# Altium PCB SM3320-BATT-EV.PcbDoc (part 1 of 2)
Units mm, origin at the board's own origin, x right, y up, seen from the top; angles counter-clockwise.
Board outline 215 x 68 mm, 2 copper layers (Top Layer, Bottom Layer), stack 1.662 mm thick; 183 components, 86 nets, 440 pads, 263 vias.
Unrouted connection lines stored in the file: 6.
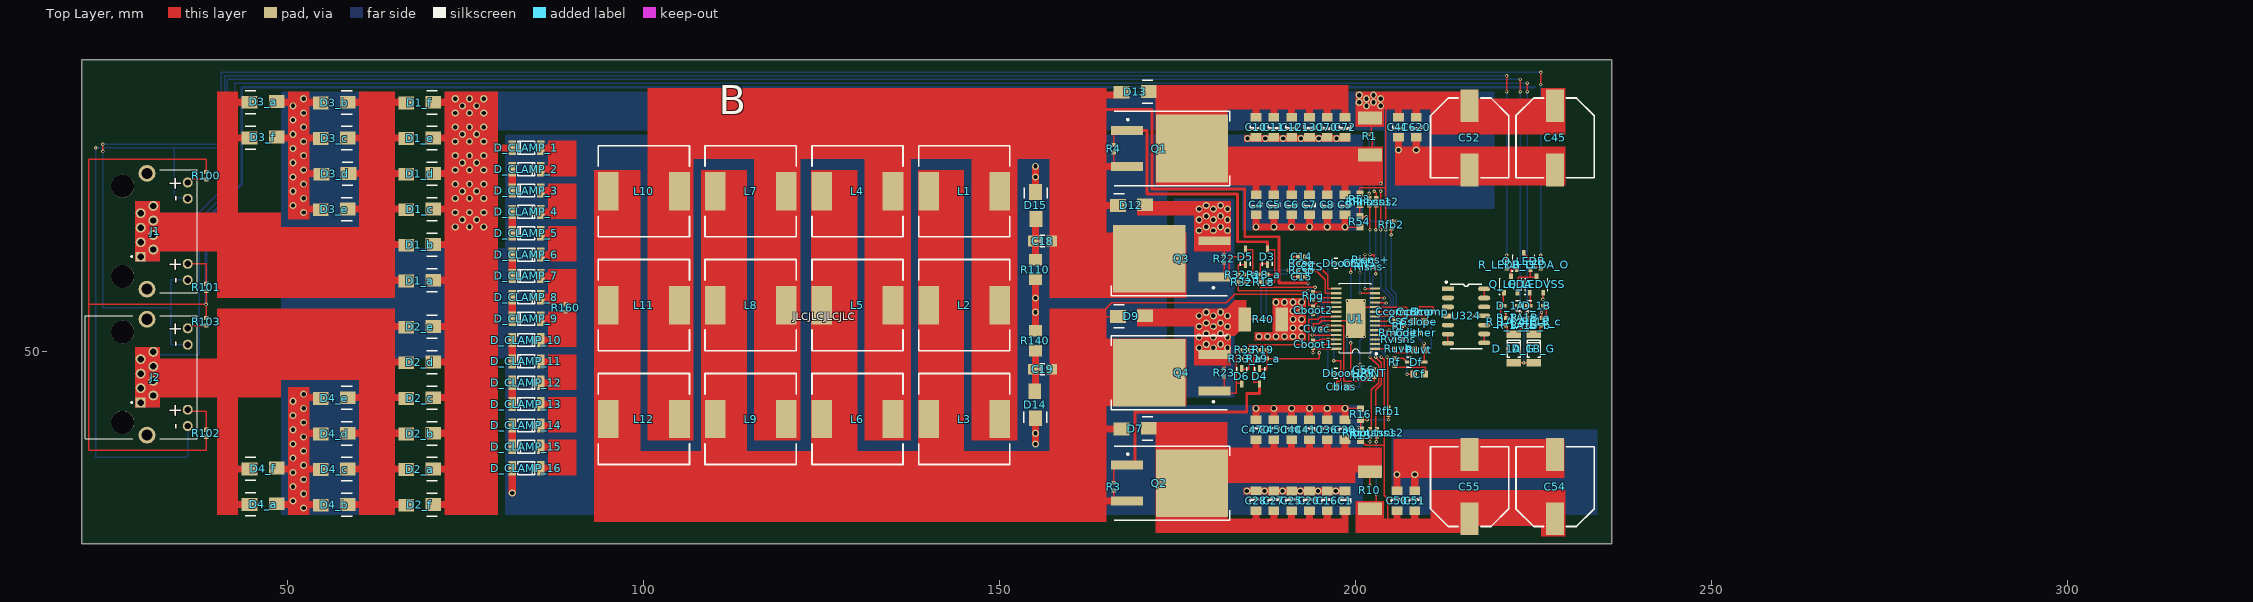
[diagram p0: Top Layer view]
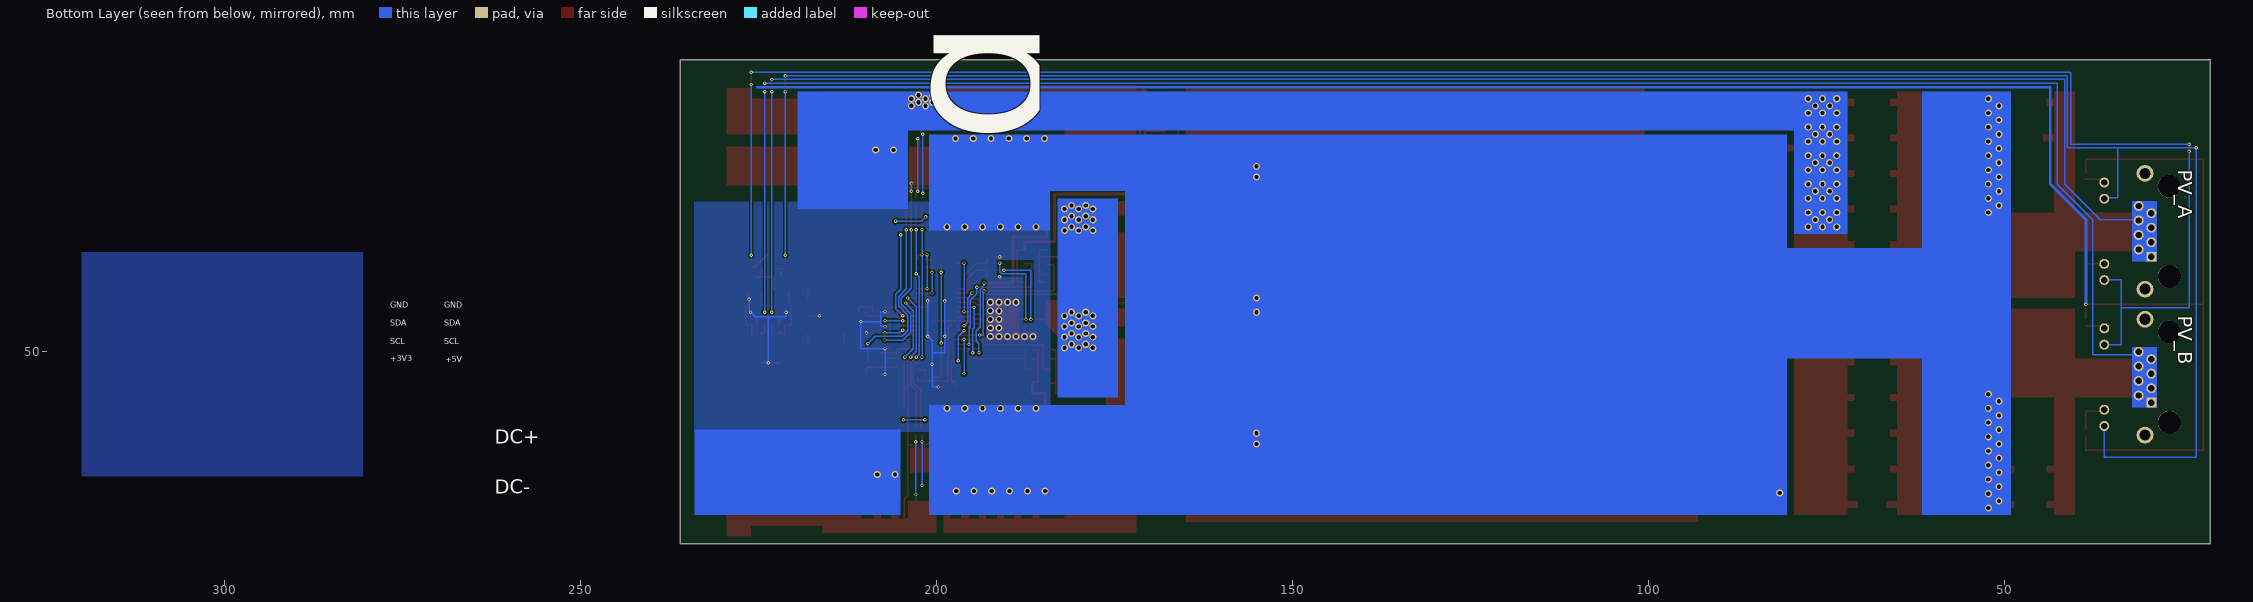
[diagram p1: Bottom Layer view, seen from below]
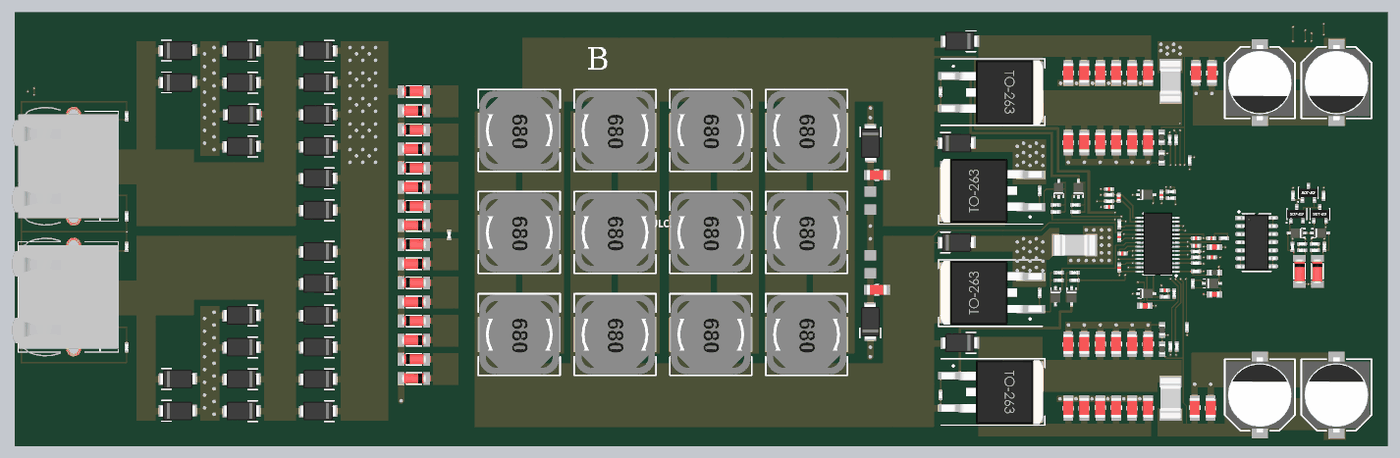
[diagram p3: 3D render of the assembled board from above, using the file's embedded part models]

## Layer stack, top to bottom
Top Solder: solder mask 0.0102, Solder Resist, Dk 3.5
Top Layer: signal copper 0.0711
Dielectric1: core 1.52, FR-4, Dk 4.8
Bottom Layer: signal copper 0.0711
Bottom Solder: solder mask 0.0102, Solder Resist, Dk 3.5

## Board outline
21,23 21,91 236,91.001 236,23

## Design rules (kind name [scope] priority, off if disabled: settings)
Clearance Clearance_12 [(IsRegion AND InNet('VIN_D') AND OnLayer('MidLayer4'))] p1: gap=0.61 ignorepadtopadclearanceinfootprint=FALSE except(0: Arc-Hole Track-Hole SMDPad-Hole THPad-Hole Via-Hole Fill-Hole Poly-Hole Region-Hole Text-Hole)
Clearance Clearance_11 [(IsRegion AND InNet('GND') AND OnLayer('MidLayer3'))] p2 off: gap=0.61 ignorepadtopadclearanceinfootprint=FALSE except(0: Arc-Hole Track-Hole SMDPad-Hole THPad-Hole Via-Hole Fill-Hole Poly-Hole Region-Hole Text-Hole)
Clearance Clearance_10 [InNamedPolygon('Top Layer-No Net 15')] p3: gap=0.635 ignorepadtopadclearanceinfootprint=FALSE except(0: Arc-Hole Track-Hole SMDPad-Hole THPad-Hole Via-Hole Fill-Hole Poly-Hole Region-Hole Text-Hole)
Clearance Clearance_8 [InNamedPolygon('Bottom Layer-No Net 5')] p4: gap=0.635 ignorepadtopadclearanceinfootprint=FALSE except(0: Arc-Hole Track-Hole SMDPad-Hole THPad-Hole Via-Hole Fill-Hole Poly-Hole Region-Hole Text-Hole)
Clearance Clearance_6 [InNamedPolygon('MidLayer1-No Net 5')] p5: gap=0.406 ignorepadtopadclearanceinfootprint=FALSE except(0: Arc-Hole Track-Hole SMDPad-Hole THPad-Hole Via-Hole Fill-Hole Poly-Hole Region-Hole Text-Hole)
Clearance Clearance_13 [InNamedPolygon('MidLayer3-No Net 5')] p6: gap=0.406 ignorepadtopadclearanceinfootprint=FALSE except(0: Arc-Hole Track-Hole SMDPad-Hole THPad-Hole Via-Hole Fill-Hole Poly-Hole Region-Hole Text-Hole)
Clearance Clearance_5 [InNamedPolygon('Top Layer-No Net 16')] p7: gap=0.635 ignorepadtopadclearanceinfootprint=FALSE except(0: Arc-Hole Track-Hole SMDPad-Hole THPad-Hole Via-Hole Fill-Hole Poly-Hole Region-Hole Text-Hole)
Clearance Clearance_3 [InNamedPolygon('Top Layer-No Net 17')] p8: gap=0.635 ignorepadtopadclearanceinfootprint=FALSE except(0: Arc-Hole Track-Hole SMDPad-Hole THPad-Hole Via-Hole Fill-Hole Poly-Hole Region-Hole Text-Hole)
Clearance Clearance_1 [InNamedPolygon('Bottom Layer-No Net 5')] p9: gap=0.635 ignorepadtopadclearanceinfootprint=FALSE except(0: Arc-Hole Track-Hole SMDPad-Hole THPad-Hole Via-Hole Fill-Hole Poly-Hole Region-Hole Text-Hole)
Clearance [InNamedPolygon('MidLayer1-No Net 5')] p10: gap=1.016 ignorepadtopadclearanceinfootprint=FALSE except(0: Arc-Hole Track-Hole SMDPad-Hole THPad-Hole Via-Hole Fill-Hole Poly-Hole Region-Hole Text-Hole)
Clearance HV_NETS [InNetClass('HV_NETS')] p11: gap=0.61 ignorepadtopadclearanceinfootprint=FALSE except(0: Arc-Hole Track-Hole SMDPad-Hole THPad-Hole Via-Hole Fill-Hole Poly-Hole Region-Hole Text-Hole)
Clearance Clearance_2 [All] p12: gap=0.254 ignorepadtopadclearanceinfootprint=FALSE except(0: Arc-Hole Track-Hole SMDPad-Hole THPad-Hole Via-Hole Fill-Hole Poly-Hole Region-Hole Text-Hole)
Clearance Clearance_9 [(InComponent('P1')) vs (OnLayer('Keep-Out Layer'))] p13: gap=0 ignorepadtopadclearanceinfootprint=FALSE
Clearance Clearance_7 [InNamedPolygon('Top Layer-No Net 4')] p14: gap=0.241 ignorepadtopadclearanceinfootprint=FALSE except(0: Arc-Hole Track-Hole SMDPad-Hole THPad-Hole Via-Hole Fill-Hole Poly-Hole Region-Hole Text-Hole)
Clearance Clearance_4 [InNamedPolygon('MidLayer1-No Net')] p15: gap=0.241 ignorepadtopadclearanceinfootprint=FALSE except(0: Arc-Hole Track-Hole SMDPad-Hole THPad-Hole Via-Hole Fill-Hole Poly-Hole Region-Hole Text-Hole)
ComponentClearance [All] p1: gap=0.635 collisioncheckmode=3 verticalgap=0.254 showdistances=FALSE
ComponentClearance ComponentClearance_1 [All] p2: gap=0.254 collisioncheckmode=3 verticalgap=0.254 showdistances=FALSE
DiffPairsRouting DiffPairsRouting_1 [All] p2: maxlimit=0.254 minlimit=0.254 mostfreqgap=0.254 toplayer_minwidth=0.381 toplayer_maxwidth=0.381 toplayer_prefwidth=0.381 bottomlayer_minwidth=0.381 bottomlayer_maxwidth=0.381 bottomlayer_prefwidth=0.381 maxuncoupledlength=12.7
FabricationTestPointUsage TestPointUsage [All] p1: valid=0 allowmultiple=FALSE
FabricationTestPointUsage TestPointUsage_1 [All] p2: valid=0 allowmultiple=FALSE
FabricationTestpoint Testpoint [All] p1: side=3 testpointundercomponent=TRUE minsize=1.016 maxsize=2.54 preferedsize=1.524 minholesize=0 maxholesize=1.016 preferedholesize=0.813 testpointgrid=0.025 allowsidetop=TRUE allowsidebottom=TRUE usegrid=TRUE gridtolerance=0
FabricationTestpoint Testpoint_1 [All] p2: side=3 testpointundercomponent=TRUE minsize=1.016 maxsize=2.54 preferedsize=1.524 minholesize=0 maxholesize=1.016 preferedholesize=0.813 testpointgrid=0.025 allowsidetop=TRUE allowsidebottom=TRUE usegrid=TRUE gridtolerance=0
FanoutControl Fanout_LCC [IsLCC] p1: bgadir=Out bgaviamode=Centered fanoutstyle=Auto fanoutdirection=Alternating viagrid=0.025 // Fanout_LCC (Default Rule)
FanoutControl Fanout_BGA [IsBGA] p2: bgadir=Out bgaviamode=Centered fanoutstyle=Auto fanoutdirection=Alternating viagrid=0.025 // Fanout_BGA (Default Rule)
FanoutControl Fanout_Default [All] p4: bgadir=Out bgaviamode=Centered fanoutstyle=Auto fanoutdirection=Alternating viagrid=0.025 // Fanout_Default (Default Rule)
FanoutControl Fanout_Small [(CompPinCount < 5)] p5: bgadir=Out bgaviamode=Centered fanoutstyle=Auto fanoutdirection=OutThenIn viagrid=0.025 // Fanout_Small (Default Rule)
FanoutControl Fanout_BGA_1 [IsBGA] p6: bgadir=Out bgaviamode=Centered fanoutstyle=Auto fanoutdirection=Alternating viagrid=0.025 // Fanout_BGA (Default Rule)
FanoutControl Fanout_LCC_1 [IsLCC] p7: bgadir=Out bgaviamode=Centered fanoutstyle=Auto fanoutdirection=Alternating viagrid=0.025 // Fanout_LCC (Default Rule)
FanoutControl Fanout_SOIC_1 [IsSOIC] p8: bgadir=Out bgaviamode=Centered fanoutstyle=Auto fanoutdirection=Alternating viagrid=0.025 // Fanout_SOIC (Default Rule)
FanoutControl Fanout_Small_1 [(CompPinCount < 5)] p9: bgadir=Out bgaviamode=Centered fanoutstyle=Auto fanoutdirection=OutThenIn viagrid=0.025 // Fanout_Small (Default Rule)
FanoutControl Fanout_Default_1 [All] p10: bgadir=Out bgaviamode=Centered fanoutstyle=Auto fanoutdirection=Alternating viagrid=0.025 // Fanout_Default (Default Rule)
Height Height_1 [All] p2: minheight=0 maxheight=25.4 prefheight=12.7
HoleSize [All] p1: absolutevalues=TRUE maxlimit=6.375 minlimit=0.198 maxpercent=80.000 minpercent=20.000
HoleSize HoleSize_1 [All] p2: absolutevalues=TRUE maxlimit=2.54 minlimit=0.025 maxpercent=80.000 minpercent=20.000
LayerPairs LayerPairs_1 [All] p2: enforce=TRUE
MinimumAnnularRing [All] p1: minimumring=0.203
PasteMaskExpansion PasteMaskExpansion_1 [All] p2: expansion=0
PlaneClearance PlaneClearance_1 [All] p2: clearance=0.508
PlaneConnect [All] p1: planeconnectstyle=Relief reliefexpansion=0.254 reliefentries=4 reliefconductorwidth=0.203 reliefairgap=0.254
PolygonConnect PolygonConnect_12 [All vs IsNamedPolygon('Top Layer-No Net 4') Or  IsNamedPolygon('Top Layer-GND') Or  IsNamedPolygon('Vout') Or  IsNamedPolygon('Top Layer-No Net 4') Or  IsNamedPolygon('Top Layer-No Net 4') Or  IsNamedPolygon('Top Layer-No Net 4') Or  IsNamedPolygon('Top Layer-No Net 4') Or  IsNamedPolygon('Top Layer-No Net 4') Or  IsNamedPolygon('Top Layer-No Net 4') Or  IsNamedPolygon('Top Layer-No Net 4') Or  IsNamedPolygon('Top Layer-No Net 4') Or  IsNamedPolygon('Top Layer-No Net 4') Or  IsNamedPolygon('Top Layer-No Net 4') Or  IsNamedPolygon('Top Layer-No Net 4') Or  IsNamedPolygon('MidLayer1-No Net') Or  IsNamedPolygon('Top Layer-No Net 4') Or  IsNamedPolygon('Top Layer-No Net 4') Or  IsNamedPolygon('Top Layer-No Net 4') Or  IsNamedPolygon('Top Layer-No Net 4') Or  IsNamedPolygon('Top Layer-No Net 4') Or  IsNamedPolygon('Top Layer-No Net 3') Or  IsNamedPolygon('Top Layer-No Net 4') Or  IsNamedPolygon('Top Layer-No Net 4') Or  IsNamedPolygon('Top Layer-No Net 4') Or  IsNamedPolygon('Top Layer-No Net 4') Or  IsNamedPolygon('Top Layer-No Net 3') Or  IsNamedPolygon('Top Layer-No Net 4') Or  IsNamedPolygon('Top Layer-No Net 4') Or  IsNamedPolygon('Top Layer-No Net 1') Or  IsNamedPolygon('Top Layer-No Net 4') Or  IsNamedPolygon('Top Layer-No Net 4') Or  IsNamedPolygon('Top Layer-No Net 4') Or  IsNamedPolygon('Top Layer-No Net 2') Or  IsNamedPolygon('Top Layer-No Net 4') Or  IsNamedPolygon('Top Layer-No Net 4') Or  IsNamedPolygon('Top Layer-No Net 4') Or  IsNamedPolygon('Top Layer-No Net 4') Or  IsNamedPolygon('Top Layer-No Net') Or  IsNamedPolygon('Top Layer-No Net 4')] p1: connectstyle=Direct reliefconductorwidth=0.254 reliefentries=4 polygonreliefangle="90 Angle" airgapwidth=0.254
PolygonConnect PolygonConnect_11 [All vs IsNamedPolygon('Vout') Or  IsNamedPolygon('MidLayer1-No Net')] p2: connectstyle=Direct reliefconductorwidth=0.254 reliefentries=4 polygonreliefangle="90 Angle" airgapwidth=0.254
PolygonConnect PolygonConnect_10 [All vs IsNamedPolygon('Top Layer-No Net 4')] p3: connectstyle=Direct reliefconductorwidth=0.254 reliefentries=4 polygonreliefangle="90 Angle" airgapwidth=0.254
PolygonConnect PolygonConnect_9 [All vs IsNamedPolygon('Top Layer-No Net 4')] p4: connectstyle=Direct reliefconductorwidth=0.254 reliefentries=4 polygonreliefangle="90 Angle" airgapwidth=0.254
PolygonConnect PolygonConnect_8 [All vs IsNamedPolygon('Top Layer-No Net') Or  IsNamedPolygon('MidLayer1-No Net') Or  IsNamedPolygon('Top Layer-No Net 4')] p5: connectstyle=Direct reliefconductorwidth=0.254 reliefentries=4 polygonreliefangle="90 Angle" airgapwidth=0.254
PolygonConnect PolygonConnect_7 [All vs IsNamedPolygon('Top Layer-No Net') Or  IsNamedPolygon('Top Layer-No Net 3') Or  IsNamedPolygon('MidLayer1-No Net')] p6: connectstyle=Direct reliefconductorwidth=0.254 reliefentries=4 polygonreliefangle="90 Angle" airgapwidth=0.254
PolygonConnect PolygonConnect_6 [All vs IsNamedPolygon('Top Layer-No Net 2') Or  IsNamedPolygon('MidLayer1-No Net') Or  IsNamedPolygon('Top Layer-No Net')] p7: connectstyle=Direct reliefconductorwidth=0.254 reliefentries=4 polygonreliefangle="90 Angle" airgapwidth=0.254
PolygonConnect PolygonConnect_5 [All vs IsNamedPolygon('Top Layer-No Net') Or  IsNamedPolygon('Top Layer-No Net 1') Or  IsNamedPolygon('MidLayer1-No Net')] p8: connectstyle=Direct reliefconductorwidth=0.254 reliefentries=4 polygonreliefangle="90 Angle" airgapwidth=0.254
PolygonConnect PolygonConnect_4 [All vs IsNamedPolygon('MidLayer1-No Net') Or  IsNamedPolygon('Top Layer-No Net')] p9: connectstyle=Direct reliefconductorwidth=0.254 reliefentries=4 polygonreliefangle="90 Angle" airgapwidth=0.254
PolygonConnect PolygonConnect_3 [All vs IsNamedPolygon('Top Layer-No Net') Or  IsNamedPolygon('Top Layer-GND')] p10: connectstyle=Direct reliefconductorwidth=0.254 reliefentries=4 polygonreliefangle="90 Angle" airgapwidth=0.254
PolygonConnect PolygonConnect_2 [All vs IsNamedPolygon('Top Layer-No Net')] p11: connectstyle=Direct reliefconductorwidth=0.254 reliefentries=4 polygonreliefangle="90 Angle" airgapwidth=0.254
PolygonConnect [All] p12: connectstyle=Direct reliefconductorwidth=0.203 reliefentries=4 polygonreliefangle="90 Angle" airgapwidth=0.254
PolygonConnect PolygonConnect_1 [All] p13: connectstyle=Direct reliefconductorwidth=0.254 reliefentries=4 polygonreliefangle="90 Angle" airgapwidth=0.254
RoutingPriority RoutingPriority_1 [All] p2: routingpriority=0
RoutingTopology RoutingTopology_1 [All] p2: topology=Shortest
RoutingVias [All] p1: holewidth=0.406 width=0.813 viastyle="Through Hole" minholewidth=0.254 minwidth=0.635 maxholewidth=0.508 maxwidth=1.016
ShortCircuit ShortCircuit_1 [All] p2: allowed=FALSE
SilkToSolderMaskClearance SilkscreenOverComponentPads [IsPad] p1: minsilkscreentomaskgap=0.127 clearancetoexposedcopper=TRUE
SolderMaskExpansion SolderMaskExpansion_2 [(IsVia And (HoleDiameter  < 15))] p1: expansion=-0.356
SolderMaskExpansion [All] p2: expansion=0.051
SolderMaskExpansion SolderMaskExpansion_1 [All] p3: expansion=0.051
UnRoutedNet UnRoutedNet_1 [All] p2:
Width [All] p1: maxlimit=2.54 minlimit=0.152 preferedwidth=0.254
20 further rules are at their usual default settings.

## Components (designator, comment, footprint, x,y, rotation, side; value= is the part's Value field where it differs from the comment)
C1 "1206B105K101NT" C_1206#1 198.497,28.995 r270 top value=1uF
C4 "1206B105K101NT" C_1206#1 186.003,70.605 r90 top value=1uF
C5 "1206B105K101NT" C_1206#1 188.5,70.6 r90 top value=1uF
C6 "1206B105K101NT" C_1206#1 191,70.6 r90 top value=1uF
C7 "1206B105K101NT" C_1206#1 193.5,70.6 r90 top value=1uF
C8 "1206B105K101NT" C_1206#1 196,70.6 r90 top value=1uF
C9 "1206B105K101NT" C_1206#1 198.5,70.6 r90 top value=1uF
C10 "1206B105K101NT" C_1206#1 186,81.5 r90 top value=1uF
C11 "1206B105K101NT" C_1206#1 188.5,81.5 r90 top value=1uF
C12 "1206B105K101NT" C_1206#1 191,81.5 r90 top value=1uF
C14 "0402CG6R8C500NT" C_0402 192.4,63.3 r180 top value=6.8pF
C15 "0402CG6R8C500NT" C_0402 192.4,60.5 r180 top value=6.8pF
C16 "1206B105K101NT" C_1206#1 195.997,28.995 r270 top value=1uF
C18 "1206B102K202NT" C_1206#2 156,65.5 r0 top value=1nF
C19 "1206B102K202NT" C_1206#2 156,47.5 r0 top value=1nF
C20 "1206B105K101NT" C_1206#1 193.497,28.995 r270 top value=1uF
C25 "1206B105K101NT" C_1206#1 190.997,28.995 r270 top value=1uF
C27 "1206B105K101NT" C_1206#1 188.497,28.995 r270 top value=1uF
C28 "1206B105K101NT" C_1206#1 186,29 r270 top value=1uF
C30 "1206B105K101NT" C_1206#1 198.5,39 r270 top value=1uF
C36 "1206B105K101NT" C_1206#1 195.997,38.995 r270 top value=1uF
C41 "1206B105K101NT" C_1206#1 206,81.5 r90 top value=1uF
C44 "1206B105K101NT" C_1206#1 190.997,38.995 r270 top value=1uF
C45 "VZH470M2ATR-1010" C_CAN_1010 228,80 r90 top value=47uF
C50 "1206B105K101NT" C_1206#1 205.8,29 r270 top value=1uF
C51 "1206B105K101NT" C_1206#1 208.3,29 r270 top value=1uF
C52 "VZH470M2ATR-1010" C_CAN_1010 216,80 r90 top value=47uF
C54 "VZH470M2ATR-1010" C_CAN_1010 228,31 r270 top value=47uF
C55 "VZH470M2ATR-1010" C_CAN_1010 216,31 r270 top value=47uF
C56 "CL05A105KA5NQNC" C_0402 201.1,47.4 r0 top value=1uF
C70 "1206B105K101NT" C_1206#1 196,81.5 r90 top value=1uF
C72 "1206B105K101NT" C_1206#1 198.5,81.5 r90 top value=1uF
C130 "1206B105K101NT" C_1206#1 193.5,81.5 r90 top value=1uF
C410 "1206B105K101NT" C_1206#1 193.497,38.995 r270 top value=1uF
C450 "1206B105K101NT" C_1206#1 188.497,38.995 r270 top value=1uF
C470 "1206B105K101NT" C_1206#1 185.997,38.995 r270 top value=1uF
C620 "1206B105K101NT" C_1206#1 208.5,81.5 r90 top value=1uF
Cbias "CC0603KRX7R9BB104" C_0603 198,45 r180 top value=100nF
Cboot1 "CL05B224KO5NNNC" C_0402 194,51 r90 top value=220nF
Cboot2 "CL05B224KO5NNNC" C_0402 194,55.8 r270 top value=220nF
Ccomp "CL05B103KB5NNNC" C_0402 208.4,55.6 r0 top value=10nF
Ccomp2 "0402B151K500NT" C_0402 206,55.6 r180 top value=150pF
CCS "0402CG560J500NT" C_0402 193.9,61.9 r270 top value=56pF
Cdither "0402B223K500NT" C_0402 208.5,52.6 r180 top value=22nF
Cf "CC0603KRX7R9BB104" C_0603 208.9,46.8 r0 top value=100nF
CISNS "CL05A105KA5NQNC" C_0402 200.6,62.4 r90 top value=1uF
Cslope "CL10C331JB8NNNC" C_0603 208.9,54.2 r180 top value=330pF
Css "CL05B104KO5NNNC" C_0402 206,54.4 r180 top value=100nF
Cvcc "CL05A105KA5NQNC" C_0402 194.5,53.2 r0 top value=1uF
D1_a "SS210" DO-214AC 68.5,60 r180 top
D1_b "SS210" DO-214AC 68.5,65 r180 top
D1_c "SS210" DO-214AC 68.5,70 r180 top
D1_d "SS210" DO-214AC 68.5,75 r180 top
D1_e "SS210" DO-214AC 68.5,80 r180 top
D1_f "SS210" DO-214AC 68.5,85 r180 top
D2_a "SS210" DO-214AC 68.5,33.5 r180 top
D2_b "SS210" DO-214AC 68.5,38.5 r180 top
D2_c "SS210" DO-214AC 68.5,43.5 r180 top
D2_d "SS210" DO-214AC 68.5,48.5 r180 top
D2_e "SS210" DO-214AC 68.5,53.5 r180 top
D2_f "SS210" DO-214AC 68.5,28.5 r180 top
D3 "N4148WS" SOD-323 187.6,63.3 r90 top
D3_a "SS210" DO-214AC 46.5,85 r0 top
D3_b "SS210" DO-214AC 56.5,85 r180 top
D3_c "SS210" DO-214AC 56.5,80 r180 top
D3_d "SS210" DO-214AC 56.6,75 r180 top
D3_e "SS210" DO-214AC 56.5,70 r180 top
D3_f "SS210" DO-214AC 46.5,80 r0 top
D4 "N4148WS" SOD-323 186.5,46.5 r270 top
D4_a "SS210" DO-214AC 46.5,28.5 r0 top
D4_b "SS210" DO-214AC 56.5,28.5 r180 top
D4_c "SS210" DO-214AC 56.5,33.5 r180 top
D4_d "SS210" DO-214AC 56.5,38.5 r180 top
D4_e "SS210" DO-214AC 56.5,43.5 r180 top
D4_f "SS210" DO-214AC 46.5,33.5 r0 top
D5 "N4148WS" SOD-323 184.5,63.3 r90 top
D6 "N4148WS" SOD-323 184,46.5 r270 top
D7 "SS210" DO-214AC 169,39.2 r180 top
D9 "SS210" DO-214AC 168.5,54.9 r0 top
D12 "SS210" DO-214AC 168.5,70.5 r0 top
D13 "SS210" DO-214AC 169,86.5 r180 top
D14 "SS210" DO-214AC 155,42.5 r90 top
D15 "SS210" DO-214AC 155,70.5 r270 top
D_1A "N4148WS" SOD-323 221.8,56.4 r180 top
D_1A_G "ZMM5V6-M" DO-213AA 222.2,50.4 r270 top
D_1B "N4148WS" SOD-323 225.4,56.4 r0 top
D_1B_G "ZMM5V6-M" DO-213AA 225,50.4 r270 top
D_CLAMP_1 "ZMM5V6-M" DO-213AA 83.5,78.6 r0 top
D_CLAMP_2 "ZMM5V6-M" DO-213AA 83.5,75.6 r180 top
D_CLAMP_3 "ZMM5V6-M" DO-213AA 83.5,72.6 r0 top
D_CLAMP_4 "ZMM5V6-M" DO-213AA 83.5,69.6 r180 top
D_CLAMP_5 "ZMM5V6-M" DO-213AA 83.5,66.6 r0 top
D_CLAMP_6 "ZMM5V6-M" DO-213AA 83.5,63.6 r180 top
D_CLAMP_7 "ZMM5V6-M" DO-213AA 83.5,60.6 r0 top
D_CLAMP_8 "ZMM5V6-M" DO-213AA 83.5,57.6 r180 top
D_CLAMP_9 "ZMM5V6-M" DO-213AA 83.5,54.6 r0 top
D_CLAMP_10 "ZMM5V6-M" DO-213AA 83.5,51.6 r180 top
D_CLAMP_11 "ZMM5V6-M" DO-213AA 83.5,48.6 r0 top
D_CLAMP_12 "ZMM5V6-M" DO-213AA 83.5,45.6 r180 top
D_CLAMP_13 "ZMM5V6-M" DO-213AA 83.5,42.6 r0 top
D_CLAMP_14 "ZMM5V6-M" DO-213AA 83.5,39.6 r180 top
D_CLAMP_15 "ZMM5V6-M" DO-213AA 83.5,36.6 r0 top
D_CLAMP_16 "ZMM5V6-M" DO-213AA 83.5,33.6 r180 top
Dboot1 "N4148WS" SOD-323 198.2,46.9 r0 top
Dboot2 "N4148WS" SOD-323 198.2,62.4 r0 top
Df "N4148WS" SOD-323 208.5,48.5 r0 top
J1 "2-406549-1" TE_2-406549-1 29.305,63.297 r270 top
J2 "2-406549-1" TE_2-406549-1 29.305,42.797 r270 top
L1 "SWRB1207S-221MT" SRR1260 145,72.5 r180 top value=220uH
L2 "SWRB1207S-221MT" SRR1260 145,56.5 r180 top value=220uH
L3 "SWRB1207S-221MT" SRR1260 145,40.5 r180 top value=220uH
L4 "SWRB1207S-221MT" SRR1260 130,72.5 r180 top value=220uH
L5 "SWRB1207S-221MT" SRR1260 130,56.5 r180 top value=220uH
L6 "SWRB1207S-221MT" SRR1260 130,40.5 r180 top value=220uH
L7 "SWRB1207S-221MT" SRR1260 115,72.5 r180 top value=220uH
L8 "SWRB1207S-221MT" SRR1260 115,56.5 r180 top value=220uH
L9 "SWRB1207S-221MT" SRR1260 115,40.5 r180 top value=220uH
L10 "SWRB1207S-221MT" SRR1260 100,72.5 r180 top value=220uH
L11 "SWRB1207S-221MT" SRR1260 100,56.5 r180 top value=220uH
L12 "SWRB1207S-221MT" SRR1260 100,40.5 r180 top value=220uH
Q1 "IRF9540NSTRLPBF" TO-263-3 174.079,78.5 r0 top
Q2 "IRF9540NSTRLPBF" TO-263-3 174.079,31.5 r0 top
Q3 "IRF9540NSTRLPBF" TO-263-3 173.921,63 r180 top
Q4 "IRF9540NSTRLPBF" TO-263-3 173.921,47 r180 top
Q_LEDA "2N7002" TO-236AB 221.8,59.4 r90 top
Q_LEDB "2N7002" TO-236AB 223.6,62.7 r90 top
Q_LEDVSS "2N7002" TO-236AB 225.4,59.4 r90 top
R1 "1m" R_2512 202,80.2 r90 top
R3 "0402WGF1002TCE" R_0402 166,31 r270 top value=10k
R4 "0402WGF1002TCE" R_0402 166,78.5 r90 top value=10k
R10 "1m" R_2512 202,30.5 r270 top
R13 "0603WAF100KT5E" R_0603 200.7,38.2 r270 top value=100k
R16 "0603WAF1002T5E" R_0603 200.7,41.2 r270 top value=10k
R18 "0402WGF100JTCE" R_0402 187.1,59.7 r0 top value=10R
R18_a "0402WGF100JTCE" R_0402 187.1,60.8 r0 top value=10R
R19 "0402WGF100JTCE" R_0402 187,50.2 r0 top value=10R
R19_a "0402WGF100JTCE" R_0402 187,49 r0 top value=10R
R22 "0402WGF1002TCE" R_0402 181.5,63 r270 top value=10k
R23 "0402WGF1002TCE" R_0402 181.5,47 r90 top value=10k
R32 "0402WGF100JTCE" R_0402 184,59.7 r0 top value=10R
R32_a "0402WGF100JTCE" R_0402 184,60.8 r0 top value=10R
R33 "0402WGF100JTCE" R_0402 184.492,50.2 r0 top value=10R
R33_a "0402WGF100JTCE" R_0402 184.492,49 r0 top value=10R
R40 "1m" R_2512 187,54.5 r0 top
R53 "0603WAF100KT5E" R_0603 200.6,71.4 r90 top value=100k
R54 "0603WAF1002T5E" R_0603 200.6,68.2 r90 top value=10k
R62 "0402WGF0000TCE" R_0402 201.1,46.4 r0 top value=0R
R100 "0402WGF1000TCE" R_0402 38.5,74.7 r270 top value=100R
R101 "0402WGF1000TCE" R_0402 38.5,59 r90 top value=100R
R102 "0402WGF1000TCE" R_0402 38.5,38.5 r90 top value=100R
R103 "0402WGF1000TCE" R_0402 38.5,54.2 r270 top value=100R
R110 "1206W4F100JT5E" R_1206 155,61.5 r90 top value=10R
R140 "1206W4F100JT5E" R_1206 155,51.5 r270 top value=10R
R160 "0402WGF0000TCE" R_0402 89,56.1 r90 top value=0R
R_1A_a "0402WGF4702TCE" R_0402 222.608,54.7 r180 top value=47k
R_1A_b "0402WGF4702TCE" R_0402 222.6,53.7 r0 top value=47k
R_1A_c "0402WGF1003TCE" R_0402 221.1,54.2 r270 top value=100k
R_1B_a "0402WGF4702TCE" R_0402 224.6,54.7 r0 top value=47k
R_1B_b "0402WGF4702TCE" R_0402 224.6,53.7 r180 top value=47k
R_1B_c "0402WGF1003TCE" R_0402 226.1,54.2 r270 top value=100k
R_LEDA_O "0402WGF0000TCE" R_0402 226,62.2 r90 top value=0R
R_LEDB_O "0402WGF0000TCE" R_0402 221.2,62.2 r90 top value=0R
Rcomp "0402WGF1202TCE" R_0402 210.4,55.6 r180 top value=12k
Rcsg "0402WGF1000TCE" R_0402 192.4,62.4 r180 top value=100R
Rcsp "0402WGF1000TCE" R_0402 192.4,61.4 r180 top value=100R
Rf "0402WGF100JTCE" R_0402 205.5,48.5 r90 top value=10R
Rfb1 "0402WGF0000TCE" R_0402 204.6,41.6 r270 top value=0R
Rfb2 "0402WGF0000TCE" R_0402 205,67.8 r90 top value=0R
Riinsns1 "0402WGF0000TCE" R_0402 201.9,71 r90 top value=0R
Riinsns2 "0402WGF0000TCE" R_0402 202.9,71 r90 top value=0R
RINT "0402WGF0000TCE" R_0402 202.6,46.9 r90 top value=0R
Rioutsns1 "0402WGF0000TCE" R_0402 202,38.6 r270 top value=0R
Rioutsns2 "0402WGF0000TCE" R_0402 203,38.6 r270 top value=0R
Risns+ "0402WGF1000TCE" R_0402 202.1,62.9 r0 top value=100R
Risns- "0402WGF1000TCE" R_0402 202.1,61.9 r0 top value=100R
Rmode "0402WGF1003TCE" R_0402 206,52.6 r180 top value=100k
Rpg "0402WGF1002TCE" R_0402 194,57.8 r90 top value=10k
Rt "0402WGF2202TCE" R_0402 206,53.5 r180 top value=22k
Ruvb "0402WGF2202TCE" R_0402 206,50.4 r180 top value=22k
Ruvt "0603WAF100KT5E" R_0603 208.9,50.2 r0 top value=100k
Rvisns "0402WGF2201TCE" R_0402 206,51.7 r180 top value=2.2k
U1 "LM5176PWPR" TSSOP-28-EP-P0.65MM-W4.4MM 200,54.6 r180 top
U324 "LM324" SOIC-14-P1.27-W3.5 215.5,55 r0 top

## Footprints (in the part's own frame and the unit in brackets; to place one, negate y for a bottom-side part, rotate by r counter-clockwise, add the part's x,y. Pads: shape width x height; smd on the part's side, far side on the other; paste and mask are expansions set on the pad)
C_0402 [mm] "Chip Capacitor; Body 1.0 x 0.5 mm (LxW typ)"
  rect 0.6x0.6 smd: 1(-0.508,0) 2(0.508,0)
  body extent -0.5,-0.3 0.5,0.3, height 0.2
C_0603 [mm] "Chip Capacitor; Body 1.6 x 0.8 mm (LxW typ)"
  rect 0.93x0.98 smd: 1(-0.77,0) 2(0.77,0)
  body extent -0.8,-0.4 0.8,0.4, height 0.3
C_1206#1 [mm] "Chip Capacitor; Body 3.2 x 1.6 mm (LxW typ)"
  rect 1.2x1.5 smd: 1(-1.395,0) 2(1.395,0)
  silkscreen extent -0.3,-0.8 0.3,0.8, body extent -1.6,-0.8 1.6,0.8, height 1
C_1206#2 [mm] "Chip Capacitor; Body 3.2 x 1.6 mm (LxW typ)"
  rect 1.5x1.5 smd: 1(-1.295,0) 2(1.295,0)
  silkscreen extent -0.3,-0.8 0.3,0.8, body extent -1.6,-0.8 1.6,0.8, height 1
C_CAN_1010 [mm] "SMD-ECAP-10x10"
  rect 4.6x2.5 smd: 1(-4.5,0) 2(4.5,0)
  silkscreen extent -5.6,-5.5 5.6,5.5, body extent -5.9,-5.25 5.9,5.25, height 10.3
DO-213AA [mm] "2 Leads"
  rect 1.1x2 smd: 1(-2,0) 2(2,0)
  silkscreen extent -1.2,-0.9 1.2,0.9, body extent -1.85,-0.8 1.85,0.8, height 1.61
DO-214AC [mm] "SMA Diode"
  rect 2.2x1.8 smd: 1(-1.9,0) 2(1.9,0.1)
  silkscreen extent -2.5,-1.6 -1,1.65, body extent -2.8,-1.48 2.8,1.47, height 2.9
R_0402 [mm] "Body 1.0 x 0.5 mm (LxW typ)"
  rect 0.6x0.6 smd: 1(-0.508,0) 2(0.508,0)
  body extent -0.5,-0.25 0.5,0.25, height 0.35
R_0603 [mm] "Body 1.6 x 0.8 mm (LxW typ)"
  rect 0.93x0.98 smd: 1(-0.77,0) 2(0.77,0)
  body extent -0.82,-0.41 0.83,0.41, height 0.46
R_1206 [mm] "Body 3.2 x 1.6 mm (LxW typ)"
  rect 1.6x1.8 smd: 1(-1.4,0) 2(1.4,0)
  body extent -1.91,-0.76 1.91,0.76, height 1
R_2512 [mm] "VISHAY SHUNT RESISTOR"
  rect 1.8x3.4 smd: 1(-2.6,0) 2(2.6,0)
  body extent -3.17,-1.57 3.17,1.6, height 1.22
SOD-323 [mm] "SOD-323/SC-76; 2 Leads; Body 1.7 x 1.3 mm, (LxW)"
  rect 1x0.45 smd: 1(-1.1,0) 2(1.1,0)
  silkscreen extent -1.3,-0.7 -0.7,0.7, body extent -1.43,-0.74 1.43,0.76, height 1.12
SOIC-14-P1.27-W3.5 [mm]
  rect 1.7x0.65 smd: 1(-2.54,3.78)
  oval 1.7x0.65 smd: 2(-2.54,2.51) 3(-2.54,1.24) 4(-2.54,-0.03) 5(-2.54,-1.3) 6(-2.54,-2.57) 7(-2.54,-3.84) 8(2.55,-3.8) 9(2.55,-2.55) 10(2.55,-1.3) 11(2.55,0) 12(2.55,1.25) 13(2.55,2.5) 14(2.55,3.8)
  silkscreen extent -2.9,-4.6 2.25,4.86, body extent -3,-4.45 3,4.35, height 1.7
SRR1260 [mm] "High Current Inductors"
  rect 2.9x5.4 smd: 1(-5,0) 2(5,0)
  silkscreen extent -6.4,-6.4 6.4,6.4, body extent -6.25,-6.25 6.25,6.25, height 6.29
TE_2-406549-1 [mm]
  rect 1.398x1.398 hole 0.89: 1(0,0)
  round 1.398 hole 0.89: 2(-1.02,1.78) 3(-2.04,0) 4(-3.06,1.78) 5(-4.08,0) 6(-5.1,1.78) 7(-6.12,0) 8(-7.14,1.78) 9(3.28,6.61) 10(0.99,6.61) 11(-8.15,6.61) 12(-10.44,6.61)
  round 2.355 hole 1.57: S1(-11.71,0.89) S2(4.55,0.89)
  round 3.25 hole 3.25 unplated: ""(-9.93,-2.54) ""(2.77,-2.54)
  silkscreen extent -12.21,-1.37 5.05,7.93, body extent -12.9,-8.76 5.74,7.96, height 14.6
TO-236AB [mm] "SOT-23-3 Leads; Body 3.1 x 3 mm, inc. leads (LxW max)"
  rect 0.8x0.55 smd: 1(-1.15,0.95) 2(-1.15,-0.95) 3(1.15,0)
  silkscreen extent -1.45,-1.55 0.9,1.65, body extent -1.28,-1.5 1.27,1.5, height 1
TO-263-3 [mm] "D2PAK"
  rect 4.5x1.25 smd: 1(-6.223,2.54) 3(-6.223,-2.54)
  rect 10.16x9.5 smd: 2(2.921,0)
  silkscreen extent -8.02,-5.21 8.25,5.21, body extent -7.94,-5.05 7.94,4.95, height 4.3
TSSOP-28-EP-P0.65MM-W4.4MM [mm] "Shrink Small Outline; 28 Leads"
  rect 2.8x5.5 smd: 0(0,0)
  rect 1.45x0.3 smd: 1(-2.7,4.23) 2(-2.7,3.58) 3(-2.7,2.93) 4(-2.7,2.28) 5(-2.7,1.63) 6(-2.7,0.98) 7(-2.7,0.33) 8(-2.7,-0.32) 9(-2.7,-0.97) 10(-2.7,-1.62) 11(-2.7,-2.27) 12(-2.7,-2.92) 13(-2.7,-3.57) 14(-2.7,-4.22) 15(2.75,-4.225) 16(2.75,-3.575) 17(2.75,-2.925) 18(2.75,-2.275) 19(2.75,-1.625) 20(2.75,-0.975) 21(2.75,-0.325) 22(2.75,0.325) 23(2.75,0.975) 24(2.75,1.625) 25(2.75,2.275) 26(2.75,2.925) 27(2.75,3.575) 28(2.75,4.225)
  silkscreen extent -3.03,-5 2.3,5.02, body extent -3.25,-5.02 3.25,4.78, height 1.1

## Part data
C1 C4 C5 C6 C7 C8 C9 C10 C11 C12 C16 C20 C25 C27 C28 C30 C36 C41 C44 C50 C51 C70 C72 C130 C410 C450 C470 C620: "C - CAPACITOR - MLCC - 1uF - 100V - 1206 - X7R", JLC Availability=Extended, LCSC Part #=C91151, WVDC=100
C14 C15: "C - CAPACITOR - MLCC - 6.8pF - 50V - 0402", JLC Availability=Basic, LCSC Part #=C1576, WVDC=50
C18 C19: "C - CAPACITOR - MLCC - 1nF - 2000V - 1206 - X7R", JLC Availability=Basic, LCSC Part #=C9196, WVDC=2000
C45 C52 C54 C55: "C - CAPACITOR - ELECTROLYTIC - 47uF - 100V", JLC Availability=Extended, LCSC Part #=C164068, ESR=40mOhm, WVDC=100
C56 CISNS Cvcc: "C - CAPACITOR - MLCC - 1uF - 25V - 0402", JLC Availability=Basic, LCSC Part #=C52923, WVDC=16
Cbias Cf: "C - CAPACITOR - MLCC - 100nF - 50V - 0603", JLC Availability=Basic, LCSC Part #=C14663, WVDC=50
Cboot1 Cboot2: "C - CAPACITOR - MLCC - 220nF - 16V - 0402", JLC Availability=Basic, LCSC Part #=C16772, WVDC=16
Ccomp: "C - CAPACITOR - MLCC - 10nF - 50V - 0402", JLC Availability=Basic, LCSC Part #=C15195, WVDC=50
Ccomp2: "C - CAPACITOR - MLCC - 150pF - 50V - 0402", JLC Availability=Basic, LCSC Part #=C1527, WVDC=50
CCS: "C - CAPACITOR - MLCC - 56pF - 50V -  0402", JLC Availability=Basic, LCSC Part #=C1572, WVDC=50
Cdither: "C - CAPACITOR - MLCC - 22nF - 50V - 0402", JLC Availability=Basic, LCSC Part #=C1532, WVDC=50
Cslope: "C - CAPACITOR - MLCC - 330pF - 50V - 0603", JLC Availability=Basic, LCSC Part #=C1664, WVDC=50
Css: "C - CAPACITOR - MLCC - 100nF - 16V - 0402", JLC Availability=Basic, LCSC Part #=C1525, WVDC=16
D1_a D1_b D1_c D1_d D1_e D1_f D2_a D2_b D2_c D2_d D2_e D2_f D3_a D3_b D3_c D3_d D3_e D3_f D4_a D4_b D4_c D4_d D4_e D4_f D7 D9 D12 D13 D14 D15: "D - DIODE - SCHOTTKY - 100V - 2A", JLC Availability=Extended, LCSC Part #=C14996, If=2A, Vrrm=100
D3 D4 D5 D6 D_1A D_1B Dboot1 Dboot2 Df: "D - DIODE - FAST TRR - 100V - 150mA - 4ns", JLC Availability=Basic, LCSC Part #=C2128, If=150mA, PIV=100V, Trr=4ns
D_1A_G D_1B_G D_CLAMP_1 D_CLAMP_2 D_CLAMP_3 D_CLAMP_4 D_CLAMP_5 D_CLAMP_6 D_CLAMP_7 D_CLAMP_8 D_CLAMP_9 D_CLAMP_10 D_CLAMP_11 D_CLAMP_12 D_CLAMP_13 D_CLAMP_14 D_CLAMP_15 D_CLAMP_16: "D - DIODE - ZENER - 5.6V - 500mW", JLC Availability=BASIC, LCSC Part #=C8062
J1 J2: "J - JACK - ETHERNET - Right - THT", JLC Availability=Extended, LCSC Part #=C125068
L1 L2 L3 L4 L5 L6 L7 L8 L9 L10 L11 L12: "L - INDUCTOR - 220uH - 1.6A - 12.5mm", JLC Availability=Extended, LCSC Part #=C169380, Isat=1.6A
Q1 Q2 Q3 Q4: "Q - TRANSISTOR - MOSFET (N) - 250V - 33A - 0.094R", JLC Availability=Extended, LCSC Part #=C33903, WVDC=100
Q_LEDA Q_LEDB Q_LEDVSS: "Q - TRANSISTOR - MOSFET (N) - 60V - 200mW", JLC Availability=Basic, LCSC Part #=C8545, WVDC=60
R1 R10 R40: library part EWSL2512F1L00S9, "R - RESISTOR - SMD - 0.001R - 1% - 2512 - 2W - 50ppm/k", JLC Availability=Extended, LCSC Part #=C349153, Power=2W, ComponentLink1Description=http://riedon.com/media/pdf/CSR.pdf, ComponentLink1URL=http://riedon.com/media/pdf/CSR.pdf
R3 R4 R22 R23 Rpg: "R - RESISTOR - SMD - 10k - 1% - 0402", JLC Availability=Basic, LCSC Part #=C25744
R13 R53 Ruvt: "R - RESISTOR - SMD - 100k - 1% -  0603", JLC Availability=Basic, LCSC Part #=C22936
R16 R54: "R - RESISTOR - SMD - 10k - 1% - 0603", JLC Availability=Basic, LCSC Part #=C25804
R18 R18_a R19 R19_a R32 R32_a R33 R33_a Rf: "R - RESISTOR - SMD - 10R - 1% - 0402", JLC Availability=Basic, LCSC Part #=C25077
R62 R160 R_LEDA_O R_LEDB_O Rfb1 Rfb2 Riinsns1 Riinsns2 RINT Rioutsns1 Rioutsns2: "R - RESISTOR - SMD - 0R - 1% - 0402", JLC Availability=Basic, LCSC Part #=C17168
R100 R101 R102 R103 Rcsg Rcsp Risns+ Risns-: "R - RESISTOR - SMD - 100R - 1% - 0402", JLC Availability=Basic, LCSC Part #=C25076
R110 R140: "R - RESISTOR - SMD - 10R - 1% - 1206", JLC Availability=Basic, LCSC Part #=C17903
R_1A_a R_1A_b R_1B_a R_1B_b: "R - RESISTOR - SMD - 47k - 1% - 0402", JLC Availability=Basic, LCSC Part #=C25792
R_1A_c R_1B_c Rmode: "R - RESISTOR - SMD - 100k - 1% -  0402", JLC Availability=Basic, LCSC Part #=C25741
Rcomp: "R - RESISTOR - SMD - 12k - 1% - 0402", JLC Availability=Basic, LCSC Part #=C25752
Rt Ruvb: "R - RESISTOR - SMD - 22k - 1% - 0402", JLC Availability=Basic, LCSC Part #=C25768
Rvisns: "R - RESISTOR - SMD - 2.2k - 1% - 0402", JLC Availability=Basic, LCSC Part #=C25879
U1: "U - IC - 55-V wide VIN synchronous 4-switch buck-boost controller 28-HTSSOP -40 to 125", LCSC Part #=C442493, Package=None, Availability=Extended, MP=LM5176QPWPR, Price=None
U324: library part LM324DT, "U - IC - OP AMP (QUAD)", JLC Availability=Basic, LCSC Part #=C71035, Speed=0.4V/us

## Via types
v1: diameter 1, hole 0.6, Top Layer to Bottom Layer, tented both sides, 168 vias
v2: diameter 0.48, hole 0.254, Top Layer to Bottom Layer, tented both sides, 95 vias

## Nets (pads, with @x,y where several pads share a name; then routed paths per layer and width w, separated by ;. In a path a pad name is that pad's centre, name@x,y a point inside that pad or via, vN(x,y) a via of type N, cw(c..) or ccw(c..) an arc to the next point about the centre after c; other vN are vias at no path point)
1A_GATE: D_1A.2 D_1A_G.1 Q_LEDA.1 R_1A_b.2 R_1A_c.2 | length 9
  Top Layer w0.2: D_1A.2@220.3,56.4 220.4,56.3 220.4,53.692 R_1A_c.2@221,53.692 ; D_1A.2@220.7,56.6 Q_LEDA.1@220.7,58.25 ; D_1A_G.1@221.3,52.1 R_1A_c.2@221.3,53.8 ; D_1A_G.1@221.6,52.4 221.8,52.6 D_1A_G.1@222.1,52.6 ; D_1A_G.1@223.1,52.2 R_1A_b.2@223.1,53.9
1B_GATE: D_1B.2 D_1B_G.1 R_1B_b.2 R_1B_c.2 | length 6.9
  Top Layer w0.2: R_1B_b.2@224.1,53.9 224.1,52.8 D_1B_G.1@224.5,52.4 ; D_1B_G.1@224.6,52.5 D_1B_G.1@224.7,52.6 ; D_1B_G.1@225.9,52.2 R_1B_c.2@225.9,53.9 ; R_1B_c.2@226.1,53.692 226.8,53.692 D_1B.2@226.8,56.4
+3V3: R100.1 R101.1 R102.1 R103.1 U324.4 | length 312.3
  Top Layer w0.2: R102.1@38.5,38 38.5,36.1 22,36.1 22,56.6 ; R103.1@38.5,54.608 v2(38.5,56.6) ; R101.1@38.5,58.5 v2(38.5,56.6) ; R100.1@38.5,75.1 38.5,77 22,77 22,56.6 ; 22,56.6 v2(38.5,56.6)
  Bottom Layer w0.4: v2(38.5,56.6) 38.5,68.5 43.5,73.5 43.5,87.1 225.1,87.1
BG1: D5.1 R32.1 R32_a.1 U1.25 | length 24.3
  Top Layer w0.2: D5.1@184.5,62.2 183.6,62.2 ; v2(193.3,58.5) 183.5,58.5 183.5,62.1 ; v2@194.1,52.3 U1.25@196.8,52.3 ; U1.25@197.25,52.325 U1.25@197.45,52.325 ; 183.5,62.1 183.6,62.2 ; 183.5,62.1 183.5,62.2 183.6,62.2
  Bottom Layer w0.2: v2(193.3,58.5) 193.4,58.4 193.4,52.3 v2(193.9,52.3)
BG2: D6.1 R33.2 R33_a.2 U1.21 | length 20.4
  Top Layer w0.2: D6.1@184,47.5 185,47.5 R33_a.2@185,49 R33.2@185,50.2 185,50.9 193.4,50.9 193.4,54.5 194.7,54.5 195.1,54.9 196.025,54.9 196.2,54.9 197.225,54.9 U1.21@197.25,54.925
BIAS: Cbias.2 U1.24 | length 10.8
  Top Layer w0.2: v2(196.1,52.9) 196.175,52.975 U1.24@197.25,52.975 ; v2(196.9,48.7) 197.9,48.7 197.9,45.8 197.3,45.8 Cbias.2@197.3,45.2
  Bottom Layer w0.2: v2(196.1,52.9) 196.9,52.1 v2(196.9,48.7)
BOOST1: Cboot1.2 Dboot1.1 U1.26 | length 9.2
  Top Layer w0.2: Cboot1.2@194,51.5 194.9,51.5 195.1,51.7 v2(196.1,51.7) 197.25,51.7 U1.26@197.25,51.675 ; v2@196,46.9 v2(196.1,46.9) Dboot1.1@196.9,46.9
  Bottom Layer w0.2: v2@196,51.7 v2(196.1,51.7) v2(196.1,46.9)
BOOST2: Cboot2.2 Dboot2.1 U1.20 | length 11.5
  Top Layer w0.2: Cboot2.2@193.9,55.2 194.5,55.2 194.9,55.6 v2(196.1,55.6) 196.025,55.6 196,55.575 U1.20@197.25,55.575 ; v2@196.2,62.4 Dboot2.1@197.1,62.4 Dboot2.1@197.2,62.4
  Bottom Layer w0.2: v2(196.1,55.6) v2(196.1,62.4)
CSN: C14.1 CCS.1 Rcsg.1 U1.15 | length 7.2
  Top Layer w0.2: Rcsg.1@192.908,62.3 Rcsg.1@192.908,62.4 ; U1.15@196.7,58.8 196.1,58.8 196.1,60.7 194.4,62.4 Rcsg.1@192.908,62.4 ; Rcsg.1@192.908,62.4 C14.1@192.908,63.092 ; C14.1@192.908,63.092 192.9,63.1 C14.1@192.908,63.092
CSP: C15.1 CCS.2 Rcsp.1 U1.16 | length 7.7
  Top Layer w0.2: C15.1@192.9,60.5 C15.1@192.908,60.5 Rcsp.1@192.908,61.4 194.4,61.4 195.7,60.1 195.7,58.175 U1.16@197.25,58.175
DITHER: Cdither.2 U1.5 | length 5.2
  Top Layer w0.2: U1.5@203,53 v2(204.7,53) ; v2(207.2,52.6) Cdither.2@207.992,52.6 Cdither.2@208,52.6
  Bottom Layer w0.2: v2(204.7,53) 205.1,52.6 v2(207.2,52.6)
EN: Ruvb.2 Ruvt.1 U1.1 | length 5.8
  Top Layer w0.2: U1.1@202.7,50.37 204.67,50.37 205.47,50.37 Ruvb.2@205.492,50.392 ; Ruvb.2@205.492,50.4 Ruvb.2@205.492,50.392 ; Ruvt.1@207.9,49.8 205.5,49.8 205.492,49.808 Ruvb.2@205.492,50.392 ; Ruvb.2@205.492,50.392 Ruvb.2@205.496,50.396 ; Ruvb.2@205.496,50.396 205.5,50.4 Ruvb.2@205.496,50.396
FB: Rfb1.1 U1.11 | length 17.4
  Top Layer w0.2: U1.11@202.7,56.87 204.33,56.87 204.3,56.84 v2(204.3,56.8) ; v2(204.4,49.2) 204.5,49.1 Rfb1.1@204.5,42.1
  Bottom Layer w0.2: v2(204.3,56.8) 203.2,55.7 203.2,50.4 v2(204.4,49.2)
FBIN: R53.1 R54.2 Rfb2.2 U324.12 | length 8.2
  Top Layer w0.2: R53.1@200.6,70.63 R54.2@200.6,68.97 R54.2@200.6,68.9 ; R54.2@200.7,68.8 200.6,68.8 R54.2@200.6,68.9 ; v2(201.5,68.9) R54.2@200.6,68.9 ; Rfb2.2@205,68.2 205.1,68.3 v2(205.7,68.3)
  Bottom Layer w0.2: v2(201.5,68.9) 202.1,68.3 v2(205.7,68.3) v2@205.8,68.2
FBIN_B: U324.13 U324.14 | length 1.3
  Top Layer w0.2: U324.14@218,58.7 218.05,58.7 U324.13@218.05,57.5
FBOUT: R13.1 R16.2 Rfb1.2 U324.10 | length 5.9
  Top Layer w0.2: R13.1@200.7,38.9 R13.1@200.7,38.97 R16.2@200.7,40.392 ; R16.2@200.7,40.43 200.7,40.4 v2(201.6,40.4) ; v2(204.6,40.4) Rfb1.2@204.6,40.9
  Bottom Layer w0.2: v2(201.6,40.4) v2(204.6,40.4)
FBOUT_B: U324.8 U324.9 | length 1.3
  Top Layer w0.2: U324.9@218,52.4 218.05,52.4 U324.8@218.05,51.2
GATEVCC: C56.2 R62.2 RINT.2 | length 2.2
  Top Layer w0.2: R62.2@201.5,46.4 R62.2@201.608,46.508 ; R62.2@201.608,46.4 R62.2@201.608,46.508 ; RINT.2@202.6,47.5 RINT.2@202.6,47.408 201.608,47.408 C56.2@201.608,47.4 R62.2@201.608,46.508
GATEVCC_R: Dboot1.2 Dboot2.2 R62.1 | length 17.3
  Top Layer w0.2: v2(199.3,51.2) Dboot1.2@199.3,46.9 199.3,46.4 R62.1@200.592,46.4 ; v2(199.3,61.1) Dboot2.2@199.3,62.4
  Bottom Layer w0.2: v2(199.3,51.2) v2(199.3,61.1)
GND: C1.1 C4.1 C5.1 C6.1 C7.1 C8.1 C9.1 C10.1 C11.1 C12.1 C14.2 C15.2 C16.1 C20.1 C25.1 C27.1 C28.1 C30.1 C36.1 C41.1 C44.1 C45.1 C50.1 C51.1 C52.1 C54.1 C55.1 C56.1 C70.1 C72.1 C130.1 C410.1 C450.1 C470.1 C620.1 Cbias.1 Ccomp2.1 Ccomp.1 Cdither.1 Cf.1 Cslope.1 Css.1 Cvcc.1 D3_a.2 D3_b.2 D3_c.2 D3_d.2 D3_e.2 D3_f.2 D4_a.2 D4_b.2 D4_c.2 D4_d.2 D4_e.2 D4_f.2 D14.1 D15.1 D_1A_G.2 D_1B_G.2 D_CLAMP_16.2 Q_LEDVSS.2 R16.1 R40.2 R54.1 R110.1 R140.1 R_1A_c.1 R_1B_c.1 Rcsg.2 Rmode.1 Rt.1 Ruvb.1 U1.0 U1.10 U1.22 U324.11 | length 107.3
  Top Layer w0.2: v2(187.4,54.5) 189.4,54.5 R40.2@189.4,54.4 ; v2(191.1,60.5) C15.2@191.892,60.5 ; v2(191.1,62.4) Rcsg.2@191.9,62.4 ; v2(191.1,63.3) C14.2@191.892,63.3 ; Cvcc.1@194,53.4 194,53.9 194.8,53.9 195.2,54.3 U1.22@196.9,54.3 ; U1.22@197.25,54.275 200.4,54.275 U1.0@200.4,53.9 ; C30.1@198.6,40.8 C30.1@198.7,40.7 ; v1@198.6,67.4 198.6,67.43 R54.1@200.6,67.43 ; v1@198.9,42 R16.1@200.392,42 ; Cbias.1@198.9,45.008 v2@199.692,45.008 ; C9.1@198.9,68.8 C9.1@199,68.9 ; C56.1@200.592,47.4 200.592,48.192 v2(200.6,48.2) ; U1.0@201.2,56.3 201.2,56.22 U1.10@202.7,56.22 ; U1.10@203.1,56.22 207.2,56.22 v2@207.2,55.7 ; Rt.1@206.5,53.4 206.508,53.392 Rmode.1@206.508,52.6 ; Css.1@206.5,54.4 206.508,54.392 Rt.1@206.508,53.5 v2(207.2,53.5) ; Ruvb.1@206.508,50.4 v2(207.2,50.4) ; Ccomp2.1@206.508,55.6 v2(207.2,55.6) Ccomp.1@207.7,55.6 ; v2(207.2,46.8) Cf.1@207.892,46.8 ; Cdither.1@209.008,52.6 v2(209.8,52.6) ; Cslope.1@209.67,54.2 v2(210.6,54.2) ; v2@216.5,55 U324.11@218.05,55 ; R_1A_c.1@221.1,54.716 v2(221.1,55.5) ; D_1A_G.2@222,48.4 D_1A_G.2@222.2,48.4 v2(223.6,48.4) D_1B_G.2@224.5,48.4 ; R_1B_c.1@226.1,54.716 v2(226.1,55.5) ; v2(226.3,57.3) 226.3,58 Q_LEDVSS.2@226.5,58.2
  Top Layer w1: v1(81.5,30.1) D_CLAMP_16.2@81.5,33.1
  Bottom Layer w0.2: v2(187.4,54.5) 187.4,60.9 190.8,60.9 191.1,61.2 v2@191.1,62.3 ; v1@196,67.4 v1(196,67.5) v1(198.5,67.5) ; 197,41.3 197.3,41.3 ; v2@198.8,57 v2(198.8,52.1) 198.8,49.8 200.6,49.8 ; v2(199.7,45) 200.6,45 v2(200.6,48.2) 200.6,49.8 ; v2@201.2,52 v2(201.2,52.1) ; v2(201.2,57.1) v2(201.2,52.1) ; v2@207.1,55.6 207.8,55.6 207.8,54.2 ; v2(207.2,46.8) v2(207.2,50.4) 210.6,50.4 v2@210.6,54.3 ; v2(207.2,53.5) 207.8,53.5 207.8,54.2 ; v2(210.6,54.2) 207.8,54.2 ; v2(221.1,55.5) 221.1,54.9 223.6,54.9 ; v2(223.6,48.4) 223.6,54.9 ; v2(226.3,57.3) 226.3,55.8 225.4,54.9 223.6,54.9 ; 200.6,49.8 200.6,51.5 v2(201.2,52.1)
  other v1: 52.2,28 50.7,29 52.2,30 184.7,30.4 187.2,30.4 189.7,30.4 192.2,30.4 194.7,30.4 197.2,30.4 50.7,31 52.2,32 205.8,32.7 208.3,32.7 50.7,33 52.2,34 50.7,35 52.2,36 50.7,37 155,37 52.2,38 155,38.5 50.7,39 52.2,40 50.7,41 52.2,42 186,42 188.5,42 191,42 193.5,42 196,42 198.5,42 50.7,43 52.2,44 186.4,52.1 187.6,52.1 188.8,52.1 190,52.1 191.2,52.1 192.4,52.1 191.2,53.3 192.4,53.3 191.2,54.5 192.4,54.5 155,55.5 191.2,55.7 192.4,55.7 188.8,56.9 190,56.9 191.2,56.9 192.4,56.9 155,57.5 186,67.5 188.5,67.5 191,67.5 193.5,67.5 52.2,69.5 50.7,70.5 52.2,71.5 50.7,72.5 52.2,73.5 50.7,74.5 155,74.5 52.2,75.5 155,76 50.7,76.5 52.2,77.5 206,78.3 208.5,78.3 50.7,78.5 52.2,79.5 184.8,79.9 187.3,79.9 189.8,79.9 192.3,79.9 194.8,79.9 197.3,79.9 50.7,80.5 52.2,81.5 50.7,82.5 52.2,83.5 50.7,84.5 52.2,85.5
  other v2: 216.4,55 198.8,57.1
IMON_IN: U324.5
IMON_IN_B: U324.6 U324.7 | length 1.2
  Top Layer w0.2: U324.6@212.96,52.43 212.96,51.24 U324.7@213,51.2
IMON_OUT: U324.3
IMON_OUT_B: U324.1 U324.2
INTVCC: Cvcc.2 RINT.1 Rpg.2 U1.23 | length 22.6
  Top Layer w0.2: Rpg.2@194,58.308 v2@194.908,58.308 ; Cvcc.2@195,53.2 195.4,53.6 v2@196,53.6 ; U1.23@197.1,53.6 v2(196.1,53.6) v2@196,53.6 ; U1.23@197.25,53.625 196,53.625 v2@196,53.6 ; U1.23@197.9,53.6 198.3,53.6 198.3,45.8 202.6,45.8 RINT.1@202.6,46.392
  Bottom Layer w0.2: v2(195,58.2) 195,58.1 195.6,57.5 195.6,54.1 196,53.7 v2@196.1,53.7
ISNS+: Riinsns1.1 Rioutsns1.1 Risns+.2 | length 33.9
  Top Layer w0.2: v2@201.9,49.2 v2(202,49.2) 203.2,48 203.2,45.6 202.2,44.6 202.2,39.2 Rioutsns1.1@202,39.2 ; v2(202,63.6) 202.608,63.6 Risns+.2@202.608,62.9 ; v2(202,67.1) Riinsns1.1@202,70.492
  Bottom Layer w0.2: v2@202,49.1 v2(202,49.2) v2(202,63.6) v2(202,67.1)
ISNS-: Riinsns2.1 Rioutsns2.1 Risns-.2 | length 33.6
  Top Layer w0.2: Risns-.2@202.608,61.9 202.8,61.708 v2(202.8,60.9) ; v2(202.8,67.1) Riinsns2.1@202.8,70.492 ; v2@202.9,49.1 203.6,48.4 203.6,45.4 202.8,44.6 202.8,39.308 Rioutsns2.1@203,39.108
  Bottom Layer w0.2: v2(202.8,67.1) v2(202.8,60.9) 202.4,60.5 202.4,49.6 v2(202.8,49.2) v2@202.9,49.3 ; v2@202.9,49.1 v2@202.9,49.2